# Altium PCB NM.BaseBoard.01.PcbDoc (part 1 of 2)
Units mm, origin at the board's own origin, x right, y up, seen from the top; angles counter-clockwise.
Board outline 100 x 120 mm, 2 copper layers (Top Layer, Bottom Layer), stack 0.747 mm thick; 54 components, 54 nets, 245 pads, 102 vias.
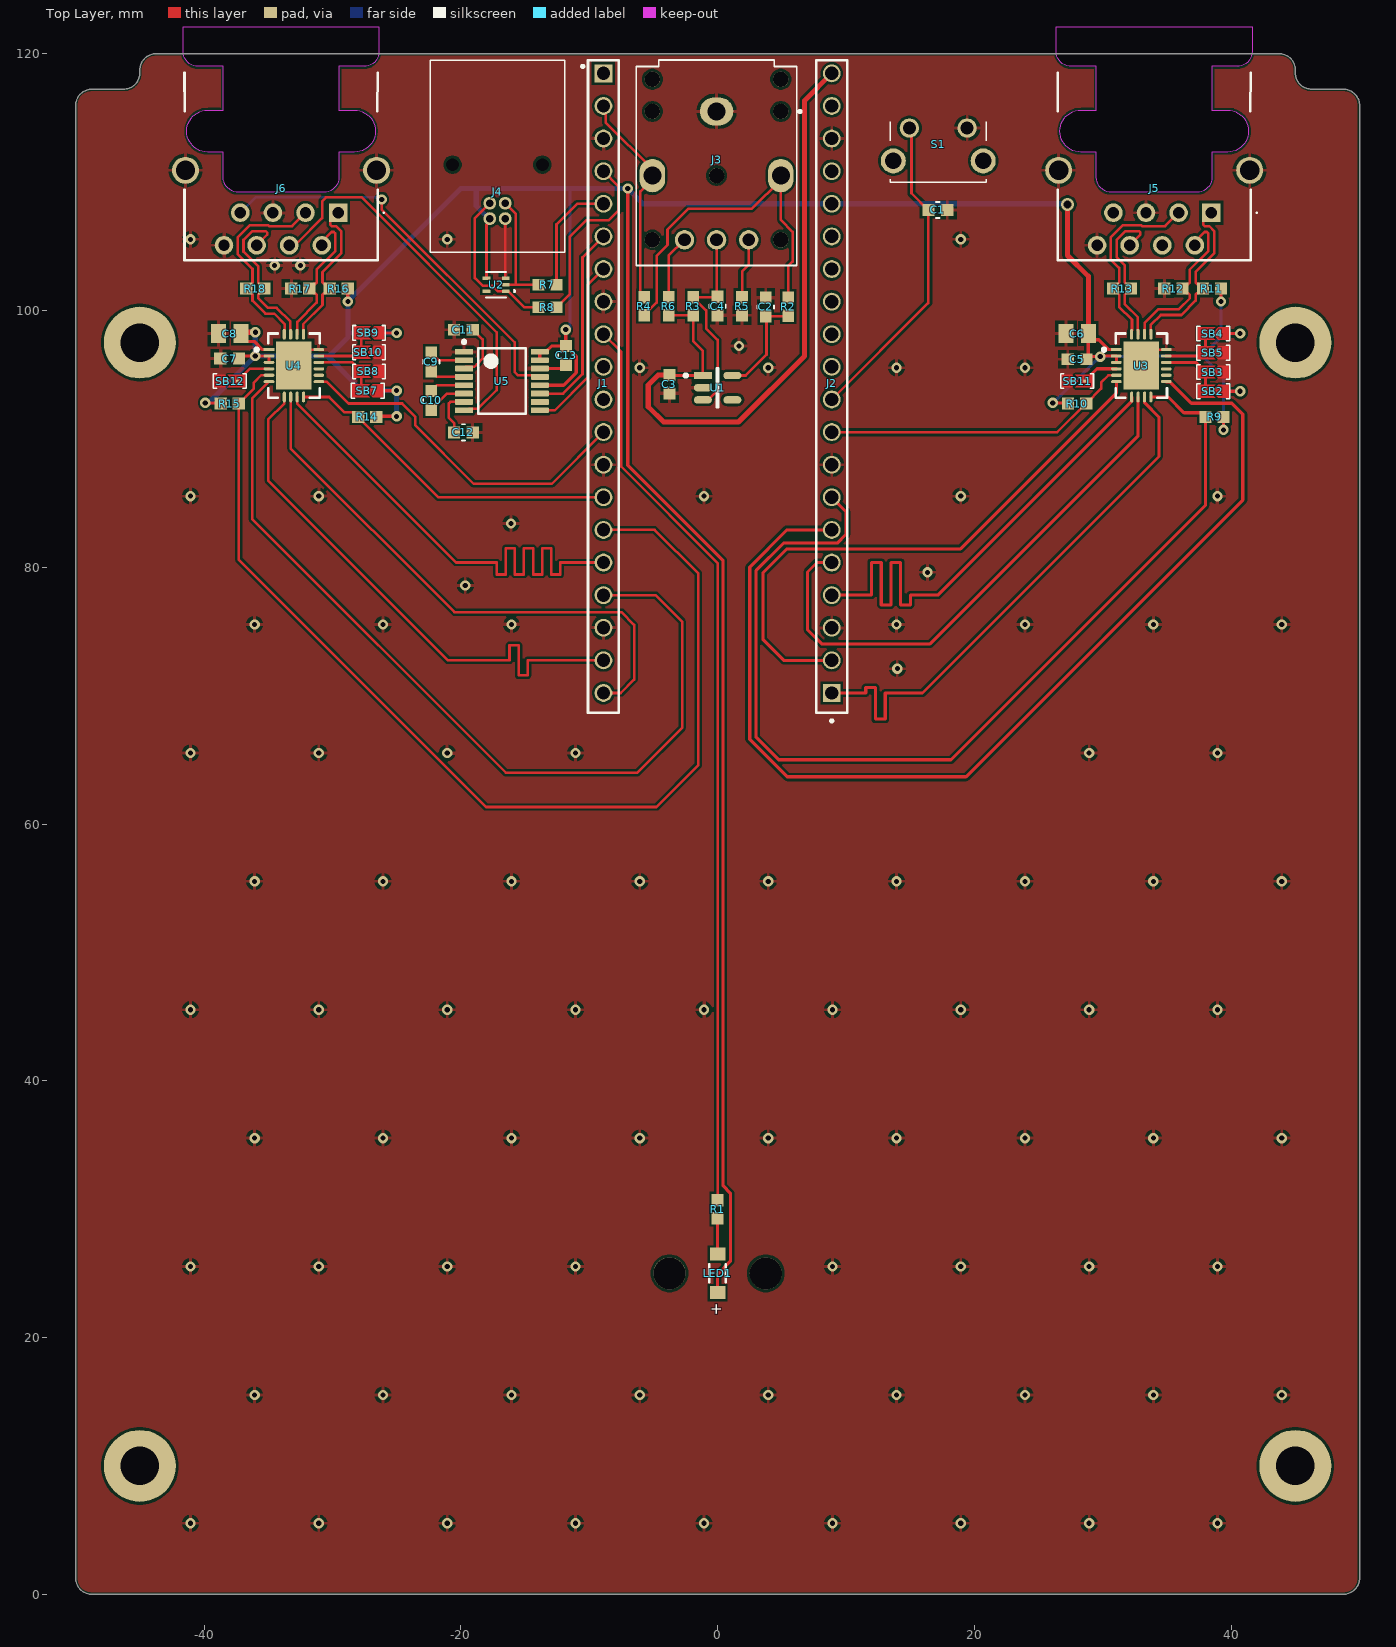
[diagram p0: Top Layer view]
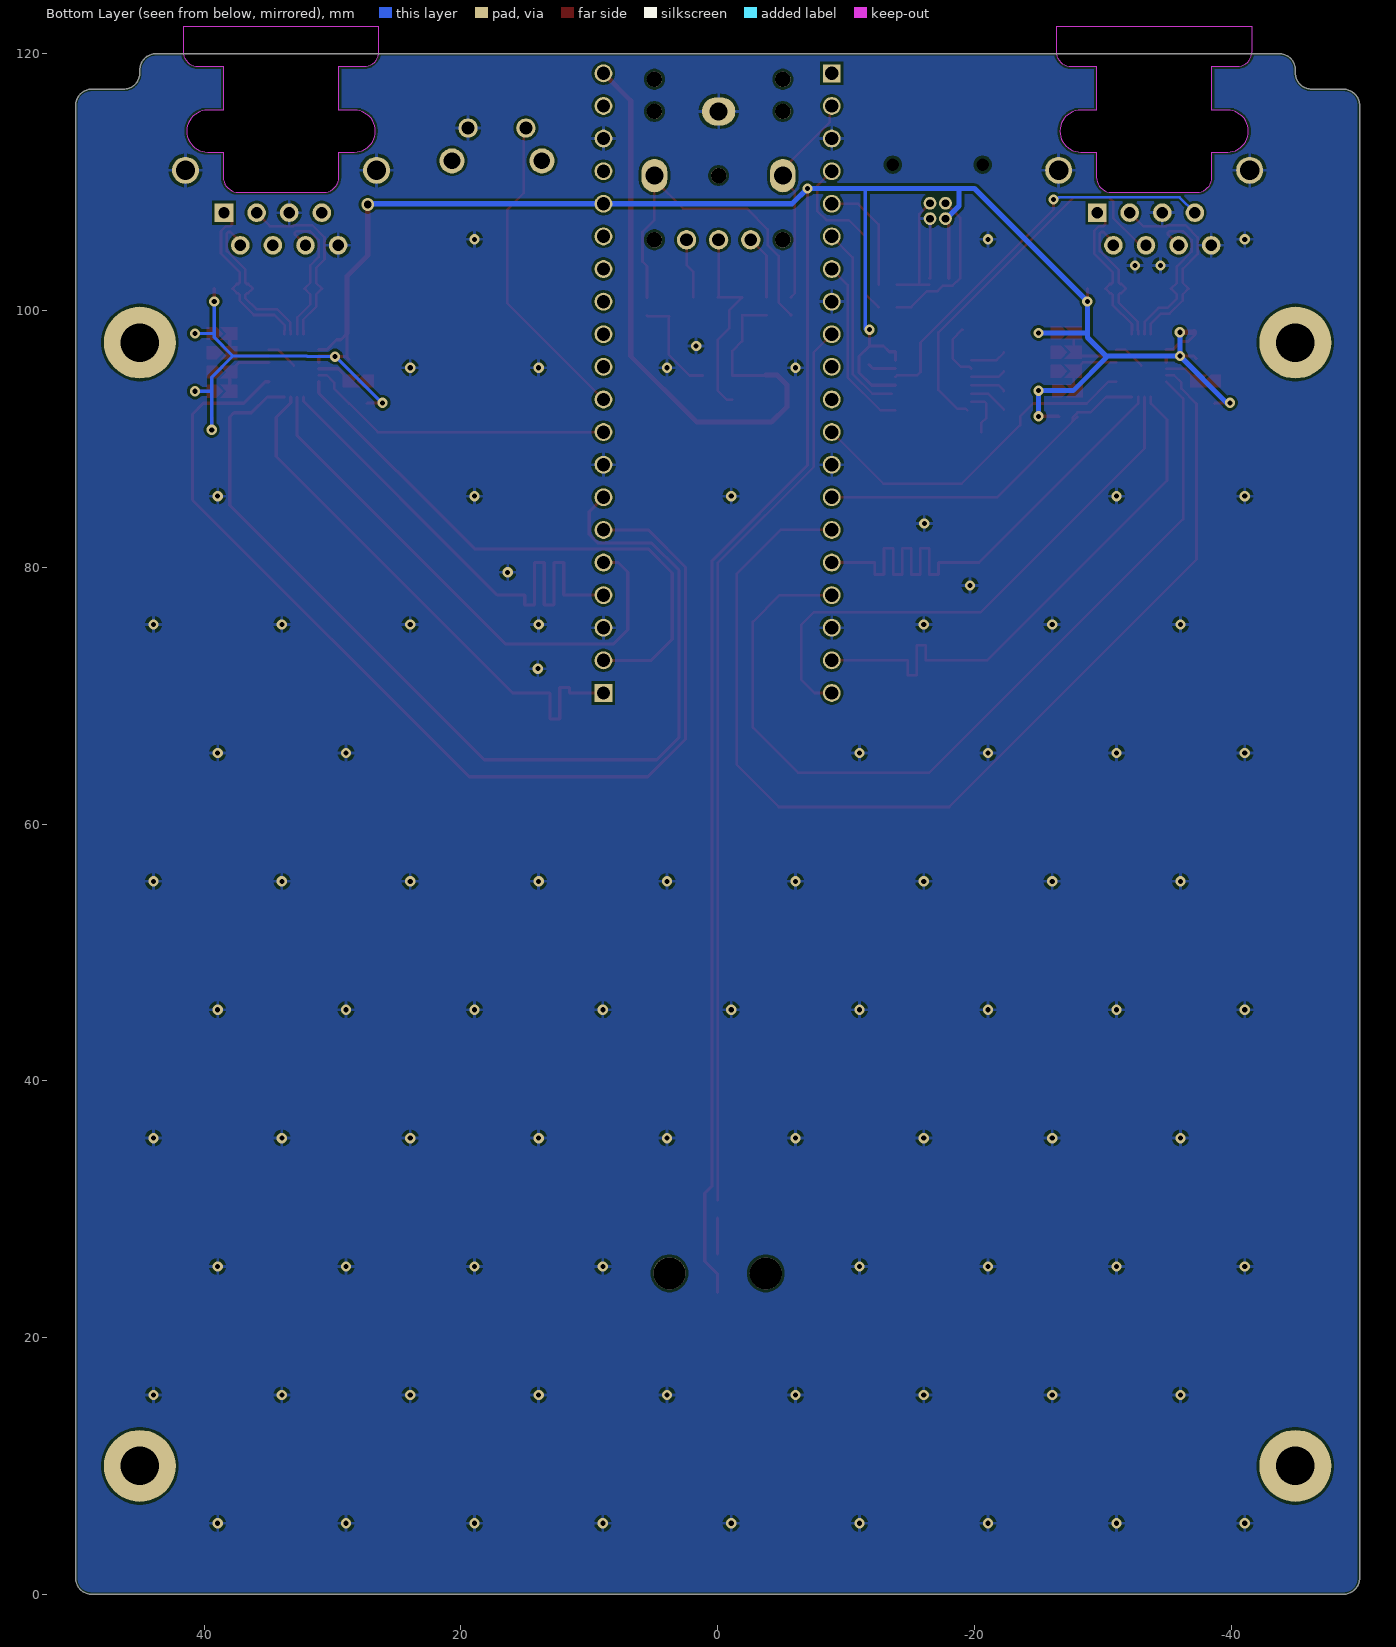
[diagram p1: Bottom Layer view, seen from below]
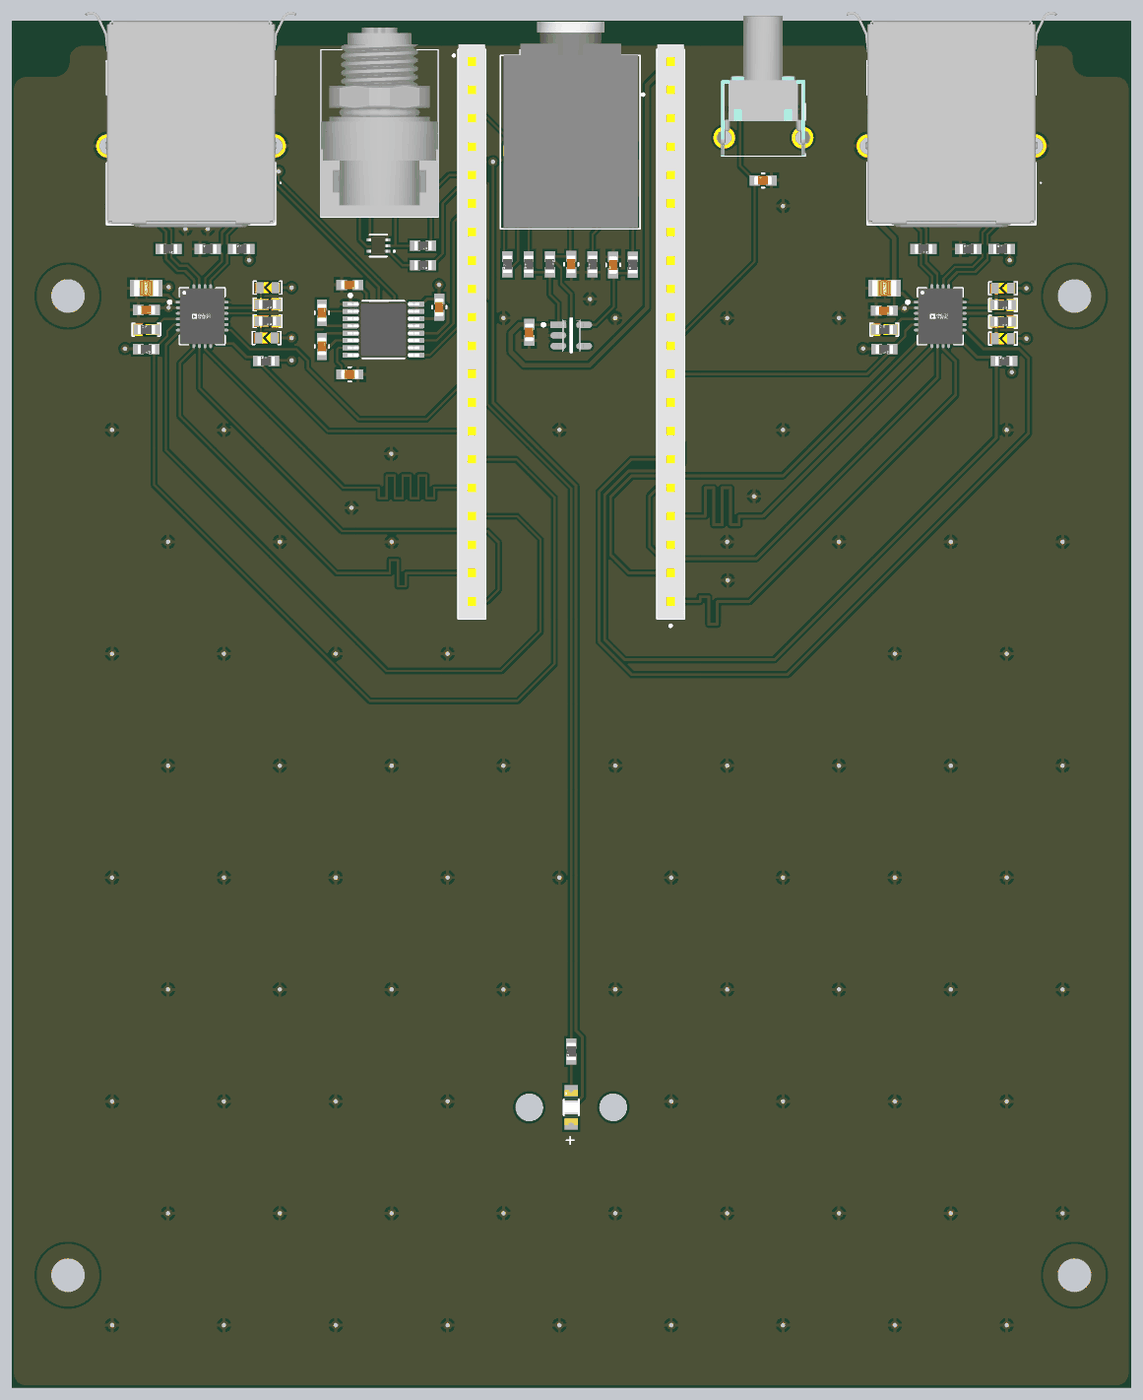
[diagram p2: 3D render of the assembled board from above, using the file's embedded part models]

## Layer stack, top to bottom
Top Solder: solder mask 0.0254, SM-001, Dk 4
Top Layer: signal copper 0.018
Dielectric 1: core 0.7112, Core-039, Dk 4.8
Bottom Layer: signal copper 0.018
Bottom Solder: solder mask 0.0254, SM-001, Dk 4

## Board outline
-50,1.27 ccw(c-48.73,1.27) -48.73,0 48.73,0 ccw(c48.73,1.27) 50,1.27 50,115.96 ccw(c48.73,115.96) 48.73,117.23 46.27,117.23 cw(c46.27,118.5) 45,118.5 45,118.73 ccw(c43.73,118.73) 43.73,120 -43.73,120 ccw(c-43.73,118.73) -45,118.73 -45,118.5 cw(c-46.27,118.5) -46.27,117.23 -48.73,117.23 ccw(c-48.73,115.96) -50,115.96

## Design rules (kind name [scope] priority, off if disabled: settings)
BoardOutlineClearance [All] p1: gap=0.15 ignorepadtopadclearanceinfootprint=FALSE except(0.05: Arc-OutlineEdge Arc-CavityEdge Arc-CutoutEdge Arc-SplitBarrior Arc-SplitContinuation)
Clearance Clearance_solderbridge [(HasFootprint('Solder Bridge 0603 On') OR HasFootprint('Solder Bridge 0603 Off'))] p1: gap=0.152 ignorepadtopadclearanceinfootprint=TRUE except(0.229: Arc-Hole Track-Hole SMDPad-Hole THPad-Hole Via-Hole Fill-Hole Poly-Hole Region-Hole)
Clearance [All] p2: gap=0.203 ignorepadtopadclearanceinfootprint=TRUE
ComponentClearance [All] p1: gap=0.254 collisioncheckmode=3 verticalgap=0.254 showdistances=FALSE donotcheckwithout3dbody=TRUE
DiffPairsRouting [All] p1: maxlimit=0.254 minlimit=0.254 mostfreqgap=0.254 toplayer_minwidth=0.2 toplayer_maxwidth=0.381 toplayer_prefwidth=0.381 bottomlayer_minwidth=0.2 bottomlayer_maxwidth=0.381 bottomlayer_prefwidth=0.381 maxuncoupledlength=12.7
HoleSize [All] p1: absolutevalues=TRUE maxlimit=4 minlimit=0.25 maxpercent=80.000 minpercent=20.000
HoleToHoleClearance [All] p1: gap=0.1 allowstackedmicrovias=TRUE
MinimumAnnularRing MinimumAnnularRing_VIA [IsVia] p1: minimumring=0.075
MinimumAnnularRing MinimumAnnularRing_VIA_U10 [OnLayer('Multi-Layer')] p2: minimumring=0.112
MinimumAnnularRing [All] p3: minimumring=0.178
MinimumSolderMaskSliver MinimumSolderMaskSliver_solderbridge [(HasFootprint('Solder Bridge 0603 On') OR HasFootprint('Solder Bridge 0603 Off'))] p1: minsoldermaskwidth=0.07
MinimumSolderMaskSliver [All] p2: minsoldermaskwidth=0.076
PolygonConnect PolygonConnect_1 [All] p1: connectstyle=Relief reliefconductorwidth=0.254 reliefentries=4 polygonreliefangle="90 Angle" airgapwidth=0.254
RoutingVias Vias_Top-Bottom [InDrillLayerPair('Top Layer - Bottom Layer')] p1: holewidth=0.4 width=0.8 viastyle="Through Hole" minholewidth=0.25 minwidth=0.5 maxholewidth=0.6 maxwidth=1
SilkToSilkClearance [All] p1: silktosilkclearance=0.1
SilkToSolderMaskClearance [IsPad] p1: minsilkscreentomaskgap=0.1 clearancetoexposedcopper=TRUE
SolderMaskExpansion SolderMaskExpansion_Vias [IsVia] p1: expansion=0 istentingtop=TRUE
SolderMaskExpansion [All] p2: expansion=0 istentingtop=FALSE
ViasUnderSMD [All] p1: allowed=TRUE
Width Width_50_Ohm [InNetClass('50 ohm')] p1 off: maxlimit=1.194 minlimit=0.2 preferedwidth=1.194
Width [All] p2: maxlimit=0.4 minlimit=0.2 preferedwidth=0.3
23 further rules are at their usual default settings.

## Classes and differential pairs
component class "SPI Extender 2": C7 C8 J6 R14 R15 R16 R17 R18 SB7 SB8 SB9 SB10 SB12 U4
component class "SPI Extender 1": C5 C6 J5 R9 R10 R11 R12 R13 SB2 SB3 SB4 SB5 SB11 U3
component class "RS232 Interface": C9 C10 C11 C12 C13 U5
component class PicoInterface: J1 J2
component class BaseFunctions: C1 C2 C3 C4 J3 J4 LED1 R1 R2 R3 R4 R5 R6 R7 R8 S1 U1 U2
differential pair TX2: +TX2_P -TX2_N
differential pair TX1: +TX1_P -TX1_N
differential pair RX2: +RX2_P -RX2_N
differential pair RX1: +RX1_P -RX1_N

## Components (designator, comment, footprint, x,y, rotation, side; value= is the part's Value field where it differs from the comment)
C1 "C0603-100nF-100V-10%-X7R" FP-GRM188-0_1-e0_2_0_5-IPC_B 17.15,107.825 r180 top value=100nF
C2 "C0603-1uF-25V-10%-X7R" FP-GRM188-0_1-e0_2_0_5-IPC_B 3.75,100.273 r270 top value=1µF
C3 "C0603-1uF-25V-10%-X7R" FP-GRM188-0_1-e0_2_0_5-IPC_B -3.75,94.25 r90 top value=1µF
C4 "C0603-100nF-100V-10%-X7R" FP-GRM188-0_1-e0_2_0_5-IPC_B 0,100.33 r90 top value=100nF
C5 "C0603-1uF-25V-10%-X7R" FP-GRM188-0_1-e0_2_0_5-IPC_B 28,96.2 r0 top value=1µF
C6 "C0805-4.7uF-16V-5%-X7R" CAPC2012X88N 28,98.2 r0 top value=4.7µF
C7 "C0603-1uF-25V-10%-X7R" FP-GRM188-0_1-e0_2_0_5-IPC_B -38,96.25 r0 top value=1µF
C8 "C0805-4.7uF-16V-5%-X7R" CAPC2012X88N -38,98.2 r0 top value=4.7µF
C9 "C0603-100nF-100V-10%-X7R" FP-GRM188-0_1-e0_2_0_5-IPC_B -22.3,96 r90 top value=100nF
C10 "C0603-100nF-100V-10%-X7R" FP-GRM188-0_1-e0_2_0_5-IPC_B -22.3,93 r90 top value=100nF
C11 "C0603-100nF-100V-10%-X7R" FP-GRM188-0_1-e0_2_0_5-IPC_B -19.8,98.5 r0 top value=100nF
C12 "C0603-100nF-100V-10%-X7R" FP-GRM188-0_1-e0_2_0_5-IPC_B -19.8,90.5 r180 top value=100nF
C13 "C0603-100nF-100V-10%-X7R" FP-GRM188-0_1-e0_2_0_5-IPC_B -11.8,96.5 r90 top value=100nF
J1 "SSW-120-01-x-S" SAMTEC_SSW-120-01-G-S -8.89,118.465 r270 top
J2 "SSW-120-01-x-S - 21-40" "SAMTEC_SSW-120-01-G-S - 21-40" 8.89,70.205 r90 top
J3 "SJ-3566AN" "CUI_SJ-3566AN - RM" -0.08,110.5 r270 top locked
J4 "853-004-213R001" 853-004-213R00Y -16.545,107.15 r180 top locked
J5 "RJULE4218201" "RJULE-42182-01 - RM" 34,121.2 r180 top
J6 "RJULE4218201" "RJULE-42182-01 - RM" -34,121.2 r180 top
LED1 "156125RS57000" "WL-SMRD_1205_normal use" 0,25 r270 top
R1 "R0603-1k5-1/16W-0.1%" FP-CPF0603-IPC_B 0,30 r90 top value=1.5k
R2 "R0603-10R-1/16W-0.1%" FP-CPF0603-IPC_B 5.5,100.298 r90 top value=10
R3 "R0603-10k-1/16W-0.1%" FP-CPF0603-IPC_B -1.905,100.33 r270 top value=10k
R4 "R0603-10k-1/16W-0.1%" FP-CPF0603-IPC_B -5.715,100.33 r90 top value=10k
R5 "R0603-1k-1/16W-0.1%" FP-CPF0603-IPC_B 1.905,100.33 r90 top value=1k
R6 "R0603-100k-1/16W-0.1%" FP-CPF0603-IPC_B -3.81,100.33 r90 top value=100k
R7 "R0603-150R-1/16W-0.1%" FP-CPF0603-IPC_B -13.25,102 r180 top value=150
R8 "R0603-150R-1/16W-0.1%" FP-CPF0603-IPC_B -13.25,100.25 r180 top value=150
R9 "R0603-10k-1/16W-0.1%" FP-CPF0603-IPC_B 38.702,91.7 r0 top value=10k
R10 "R0603-10k-1/16W-0.1%" FP-CPF0603-IPC_B 28,92.75 r180 top value=10k
R11 "R0603-620R-1/16W-0.1%" FP-CPF0603-IPC_B 38.5,101.7 r0 top value=620
R12 "R0603-620R-1/16W-0.1%" FP-CPF0603-IPC_B 35.5,101.7 r0 top value=620
R13 "R0603-110R-1/16W-0.1%" FP-CPF0603-IPC_B 31.5,101.7 r180 top value=110
R14 "R0603-10k-1/16W-0.1%" FP-CPF0603-IPC_B -27.298,91.7 r0 top value=10k
R15 "R0603-10k-1/16W-0.1%" FP-CPF0603-IPC_B -38,92.75 r180 top value=10k
R16 "R0603-620R-1/16W-0.1%" FP-CPF0603-IPC_B -29.5,101.7 r0 top value=620
R17 "R0603-620R-1/16W-0.1%" FP-CPF0603-IPC_B -32.5,101.7 r0 top value=620
R18 "R0603-110R-1/16W-0.1%" FP-CPF0603-IPC_B -36,101.7 r180 top value=110
S1 "PTS645VM83-2LFS" PTS645VM83-2LFS 19.435,114.2 r180 top locked
SB2 "Solder Bridge 0603 Off" "Solder Bridge 0603 Off" 38.6,93.7 r180 top
SB3 "Solder Bridge 0603 On" "Solder Bridge 0603 On" 38.6,95.2 r180 top
SB4 "Solder Bridge 0603 Off" "Solder Bridge 0603 Off" 38.6,98.2 r180 top
SB5 "Solder Bridge 0603 On" "Solder Bridge 0603 On" 38.6,96.7 r180 top
SB7 "Solder Bridge 0603 Off" "Solder Bridge 0603 Off" -27.25,93.75 r180 top
SB8 "Solder Bridge 0603 On" "Solder Bridge 0603 On" -27.15,95.25 r180 top
SB9 "Solder Bridge 0603 Off" "Solder Bridge 0603 Off" -27.15,98.25 r180 top
SB10 "Solder Bridge 0603 On" "Solder Bridge 0603 On" -27.15,96.75 r180 top
SB11 "Solder Bridge 0603 On" "Solder Bridge 0603 On" 28,94.5 r0 top
SB12 "Solder Bridge 0603 On" "Solder Bridge 0603 On" -38,94.5 r0 top
U1 "AP2112K-3.3TRG1" FP-SOT25-IPC_B 0,93.98 r0 top
U2 "TPD3E001DRLR" DRL5_TEX -17.25,102 r180 top
U3 "LTC4332HUFD#PBF" FP-UFD-20-05-08-1711-IPC_B 33,95.7 r0 top
U4 "LTC4332HUFD#PBF" FP-UFD-20-05-08-1711-IPC_B -33,95.7 r0 top
U5 "SN75C3221PWR" PW0016A_N -16.8,94.5 r0 top

## Footprints (in the part's own frame and the unit in brackets; to place one, negate y for a bottom-side part, rotate by r counter-clockwise, add the part's x,y. Pads: shape width x height; smd on the part's side, far side on the other; paste and mask are expansions set on the pad)
853-004-213R00Y [mm] "M5 FEMALE - RIGHT ANGLE - 4 POSITION"
  round 1 hole 0.6: 1(0,0) 2(1.2,0) 3(1.2,-1.2) 4(0,-1.2)
  round 0.6 hole 1 unplated: 5(-2.9,-4.2) 6(4.1,-4.2)
  silkscreen extent -4.65,-12.35 5.85,2.6, body extent -4.65,-14.35 5.85,2.55, height 10.55
CAPC2012X88N [mm] "SnapEDA"
  rect 1.16x1.47 smd: 1(-0.875,0) 2(0.875,0)
  body extent -1.1,-0.72 1.1,0.72, height 1
"CUI_SJ-3566AN - RM" [mm] "3.5 mm, Stereo, Right Angle, Through Hole, SPDT Switch, Audio Jack Connector"
  oval 2.2x2.6 hole 1.4: 1(-5,0)
  oval 2.6x2 hole 1.4: 2(0,-5) 3(0,5)
  round 1.508 hole 1: 4(5,2.5) 5(5,0) 6(5,-2.5)
  round 1.2 hole 1.2 unplated: MH1(5,5) MH2(5,-5) MH3(0,0) MH4(-5,5) MH5(-5,-5) MH6(-7.5,5) MH7(-7.5,-5)
  silkscreen extent -9,-6.24 7,6.6, body extent -11.54,-5.97 6.96,6.03, height 5.5
DRL5_TEX [mil] "5-SOT-5X3"
  rect 24x10 smd paste+0 mask+0: 1(-29.5,19.68) 2(-29.5,0) 3(-29.5,-19.69) 4(29.5,19.68) 5(29.5,-19.69)
  silkscreen extent -58,-39 31,39, body extent -34,-34 34,34, height 24
FP-CPF0603-IPC_B [mm]
  rect 0.958x0.912 smd paste+0 mask+0: 1(-0.702,0) 2(0.702,0)
  body extent -1.43,-0.71 1.43,0.71, height 0.25
FP-GRM188-0_1-e0_2_0_5-IPC_B [mm]
  rect 0.959x0.912 smd paste+0 mask+0: 1(-0.727,0) 2(0.727,0)
  silkscreen extent -0.13,-0.64 0.13,0.64, body extent -1.46,-0.71 1.46,0.71, height 0.25
FP-SOT25-IPC_B [mm]
  rect 1.407x0.576 smd paste+0 mask+0: 1(-1.151,0.95)
  rrect100% 1.407x0.576 smd paste+0 mask+0: 2(-1.151,0) 3(-1.151,-0.95) 4(1.151,-0.95) 5(1.151,0.95)
  silkscreen extent -2.6,-1.5 0.05,1.5, body extent -2.1,-1.75 2.1,1.75, height 0.25
FP-UFD-20-05-08-1711-IPC_B [mm]
  rect 0.831x0.242 smd paste+0 mask+0: 1(-1.941,1.25)
  rrect100% 0.831x0.242 smd paste+0 mask+0: 2(-1.941,0.75) 3(-1.941,0.25) 4(-1.941,-0.25) 5(-1.941,-0.75) 6(-1.941,-1.25) 11(1.941,-1.25) 12(1.941,-0.75) 13(1.941,-0.25) 14(1.941,0.25) 15(1.941,0.75) 16(1.941,1.25)
  rrect100% 0.242x0.831 smd paste+0 mask+0: 7(-0.75,-2.441) 8(-0.25,-2.441) 9(0.25,-2.441) 10(0.75,-2.441) 17(0.75,2.441) 18(0.25,2.441) 19(-0.25,2.441) 20(-0.75,2.441)
  rect 2.75x3.75 smd paste-1000 mask+0: 21(0,0)
  silkscreen extent -3.03,-2.5 2,2.5, body extent -2.61,-3.11 2.61,3.11, height 0.25
PTS645VM83-2LFS [mm] "PTS645 Series - 6 mm Tact Switches"
  round 1.5 hole 1: 1(0,0) 2(4.5,0)
  round 1.95 hole 1.3: MH1(-1.25,2.55) MH2(5.75,2.55)
  silkscreen extent -1.5,-0.5 6,4.2, body extent -1.96,-8.33 6.53,4.17, height 7.4
PW0016A_N [mm] "SOP, 16-Leads, Body 5.1x4.5mm, Pitch 0.65mm, IPC Medium Density"
  rrect22% 1.4x0.45 smd: 1(-2.95,2.275) 2(-2.95,1.625) 3(-2.95,0.975) 4(-2.95,0.325) 5(-2.95,-0.325) 6(-2.95,-0.975) 7(-2.95,-1.625) 8(-2.95,-2.275) 9(2.95,-2.275) 10(2.95,-1.625) 11(2.95,-0.975) 12(2.95,-0.325) 13(2.95,0.325) 14(2.95,0.975) 15(2.95,1.625) 16(2.95,2.275)
  silkscreen extent -3.07,-2.55 1.85,3.17, body extent -3.21,-2.5 3.21,2.5, height 1
"RJULE-42182-01 - RM" [mm] "Modular Connectors / Ethernet Connectors 8 contacts;Ultra Low profile;RA TH; RJ45 / With Round Mounting Holes"
  rect 1.446x1.446 hole 0.89: 1(-4.445,13.589)
  round 1.446 hole 0.89: 2(-3.175,16.129) 3(-1.905,13.589) 4(-0.635,16.129) 5(0.635,13.589) 6(1.905,16.129) 7(3.175,13.589) 8(4.445,16.129)
  round 2.1 hole 1.5: MH1(-7.44,10.289) MH2(7.44,10.289)
  round 1.63 hole 3.26 unplated: MH3(5.715,7.239) MH4(-5.715,7.239)
  Keep-Out Layer board cut-out: -7.625,-0.893 -7.625,1.02 -7.535,1.472 -7.279,1.854 -6.897,2.11 -6.445,2.2 -6.445,2.2 -4.5,2.2 -4.5,5.609 -5.715,5.609 -6.339,5.733 -6.868,6.086 -7.221,6.615 -7.345,7.239 -7.345,7.239 -7.221,7.863 -6.868,8.392 -6.339,8.745 -5.715,8.869 -5.715,8.869 -4.5,8.869 -4.5,10.82 -4.41,11.272 -4.154,11.654 -3.772,11.91 -3.32,12 -3.32,12 3.32,12 3.772,11.91 4.154,11.654 4.41,11.272 4.5,10.82 4.5,10.82 4.5,8.869 5.715,8.869 6.339,8.745 6.868,8.392 7.221,7.863 7.345,7.239 7.345,7.239 7.221,6.615 6.868,6.086 6.339,5.733 5.715,5.609 5.715,5.609 4.5,5.609 4.5,2.2 6.445,2.2 6.897,2.11 7.279,1.854 7.535,1.472 7.625,1.02 7.625,1.02 7.625,-0.893
  silkscreen extent -8.05,2.7 7.52,17.29, body extent -9.45,-1.69 9.46,17.56, height 9.58
SAMTEC_SSW-120-01-G-S [mm] "Socket Strip, 0.100\" Pitch"
  rect 1.39x1.39 hole 1.04: 1(0,0)
  round 1.39 hole 1.04: 2(2.54,0) 3(5.08,0) 4(7.62,0) 5(10.16,0) 6(12.7,0) 7(15.24,0) 8(17.78,0) 9(20.32,0) 10(22.86,0) 11(25.4,0) 12(27.94,0) 13(30.48,0) 14(33.02,0) 15(35.56,0) 16(38.1,0) 17(40.64,0) 18(43.18,0) 19(45.72,0) 20(48.26,0)
  silkscreen extent -1.03,-1.71 49.79,1.21, body extent -1.52,-1.21 49.78,1.21, height 8.51
"SAMTEC_SSW-120-01-G-S - 21-40" [mm] "Socket Strip, 0.100\" Pitch (pins 21 - 40)"
  rect 1.39x1.39 hole 1.04: 21(0,0)
  round 1.39 hole 1.04: 22(2.54,0) 23(5.08,0) 24(7.62,0) 25(10.16,0) 26(12.7,0) 27(15.24,0) 28(17.78,0) 29(20.32,0) 30(22.86,0) 31(25.4,0) 32(27.94,0) 33(30.48,0) 34(33.02,0) 35(35.56,0) 36(38.1,0) 37(40.64,0) 38(43.18,0) 39(45.72,0) 40(48.26,0)
  silkscreen extent -2.27,-1.21 49.29,1.21, body extent -1.52,-1.21 49.78,1.21, height 8.51
"Solder Bridge 0603 Off" [mil] "Solder Bridge 0603 OFF"
  round 10 smd paste-393.7 mask+1.97: 1(-19.69,0) 2(23.62,0)
  Top Layer region: -5.91,19.68 13.78,0 -5.91,-19.68 47.24,-19.68 47.24,19.68 -5.91,19.68
  Top Layer region: -47.24,-19.68 -47.24,19.68 -15.75,19.68 3.94,0 -15.75,-19.68 -47.24,-19.68
  silkscreen extent -50,-23 50,23
"Solder Bridge 0603 On" [mil] "Solder Bridge 0603 ON"
  round 10 smd paste-393.7 mask+1.97: 1(-19.69,0) 2(23.62,0)
  Top Layer region: -47.24,-19.68 -47.24,19.68 -15.75,19.68 3.94,0 -15.75,-19.68 -47.24,-19.68
  Top Layer region: -5.91,19.68 13.78,0 -5.91,-19.68 47.24,-19.68 47.24,19.68 -5.91,19.68
  silkscreen extent -50,-23 50,23, body extent -56,-28 56,28, height 10
"WL-SMRD_1205_normal use" [mm] "SMD Mono-color  Reverse mount Diffused, body 3.2x1.2mm"
  rect 1x1.2 smd: 1(-1.5,0) 2(1.5,0)
  silkscreen extent -0.7,-0.65 0.7,0.65, body extent -1.6,-0.6 1.6,0.6, height 1.1

## Part data
C1 C4 C9 C10 C11 C12 C13: library part CMP-611-0027-15, "0.1µF ±10% 100V Ceramic Capacitor X7R 0603 (1608 Metric)", Capacitance=100nF, Capacitor Type=Ceramic, Case Code (Imperial)=0603, Case Code (Metric)=1608, Dielectric=X7R, Max Operating Temperature=125°C, Min Operating Temperature=-55°C, Package Quantity=1, Tolerance=10%, Voltage=100V, Case/Package=0603, Construction=Flat, Depth=0.8mm, Height=0.8mm, Lead Free="Lead Free", Length=1.6mm, Material=Ceramic, Mount="Surface Mount", Packaging="Tape and Reel", Pick&PlaceFootprint=0603_CAP, Radiation Hardening=No, REACH SVHC="No SVHC", RoHS=Yes, RoHS Compliant=Yes, Series=GRM, Size=0.8mm, Termination=SMD/SMT, Thickness=0.035inch, Voltage Rating=100V, Voltage Rating (DC)=100V, Weight=0.000222oz, Width=0.8mm
C2 C3 C5 C7: library part CMP-611-0033-2, "1µF ±10% 25V Ceramic Capacitor X7R 0603 (1608 Metric)", Capacitance=1uF, Capacitor Type=Ceramic, Case Code (Imperial)=0603, Case Code (Metric)=1608, Dielectric=X7R, Max Operating Temperature=125°C, Min Operating Temperature=-55°C, Package Quantity=1, Tolerance=10%, Voltage=25V, Case/Package=0603, Construction=Flat, Depth=0.8mm, Height=0.9mm, Lead Free="Lead Free", Length=1.6mm, Material=Ceramic, Mount="Surface Mount", Packaging="Tape and Reel", Pick&PlaceFootprint=0603_CAP, Radiation Hardening=No, REACH SVHC=Yes, RoHS=Yes, RoHS Compliant=Yes, Series=GRM, Size=0.8mm, Termination=Wraparound, Thickness=0.035inch, Voltage Rating=25V, Voltage Rating (DC)=25V, Weight=0.000222oz, Width=0.8mm
C6 C8: library part CMP-611-0019-6, "4.7uF ±5% 16V Ceramic Capacitor X7R 0805 (2012 Metric)", Capacitance=4.7uF, Capacitor Type=Ceramic, Case Code (Imperial)=0805, Case Code (Metric)=2012, Dielectric=X7R, Max Operating Temperature=125°C, Min Operating Temperature=-55°C, Package Quantity=1, Tolerance=5%, Voltage=16V, Case/Package=0805, Depth=1.25mm, Dissipation Factor=0.025%, Height=1.25mm, Lead Free="Lead Free", Length=2mm, Material=Ceramic, Mount="Surface Mount", Number of Pins=2, Packaging="Cut Tape", Pick&PlaceFootprint=C0805, Radiation Hardening=No, REACH SVHC="No SVHC", RoHS=Yes, Termination=SMD/SMT, Thickness=0.053inch, Voltage Rating=16V, Voltage Rating (DC)=16V, Width=0.049inch
J1: library part CMP-310-0034-2, "Conn Socket Strip SKT 20 POS 2.54mm Solder ST Thru-Hole", Color=Black, Contact Material=Bronze, Contact Plating=Gold, Gender=Female, Mating Cycles=100, Mount="Through Hole", Number of Contacts=20, Number of Rows=1, Pitch=2.54mm, RoHS Compliant=Yes, Termination=Solder
J2: library part CMP-310-0035-1, "Conn Socket Strip SKT 20 POS 2.54mm Solder ST Thru-Hole (pins 21 - 40)", Color=Black, Contact Material=Bronze, Contact Plating=Gold, Gender=Female, Mating Cycles=100, Mount="Through Hole", Number of Contacts=20, Number of Rows=1, Pitch=2.54mm, RoHS Compliant=Yes, Termination=Solder
J3: library part CMP-300-0000-5, "3.5 mm, Stereo, Right Angle, Through Hole, SPDT Switch, Audio Jack Connector", Body/Shell Style=JACK, Connector Type="AUDIO/RCA CONNECTOR", Contact Finish - Mating="NOT SPECIFIED", DIN Conformance=No, IEC Conformance=No, MIL Conformance=No, Mount="Through Hole", Number of Poles=3, Number of Ports=1, Option="General Purpose", PartNumber=SJ-3566AN, Pick&PlaceFootprint=SJ-356xxx, REACH SVHC=Yes, RoHS Compliant=Yes, Termination=Solder
J4: library part CMP-370-0028-2, "CONN PLUG FMALE 4POS GOLD SOLDER", Current Rating=1A, Max Operating Temperature=85°C, Min Operating Temperature=-40°C, Ratings="IP67,Waterproof,Dust Tight", Voltage Rating=60V, Connector Type=Receptacle, Contact Plating=Gold, Fastening Type=Threaded, Mount="Through Hole,Panel", Number of Pins=4, Number of Positions=4, Packaging=Tray, REACH SVHC="No SVHC", RoHS Compliant=Yes, Termination=Solder
J5 J6: library part CMP-300-0001-5, "Modular Jack - Right Angle, Input Output Connectors RJ45, 8P8C, Without LEDs, Shield.", PartNumber=RJULE-42182-01, Mount="Surface Mount"
LED1: library part CMP-520-0011-1, "Single Color LED", Mount="Surface Mount", Optoelectronic Device Type="SINGLE COLOR LED", PartNumber=156125RS57000, REACH SVHC=Yes, RoHS Compliant=Yes
R1: library part CMP-633-0029-14, "Surface Mount Resistor 1k5 Ohm 1/16 W 0.1% 0603 (1608 Metric)", Case Code (Imperial)=0603, Case Code (Metric)=1608, Max Operating Temperature=155°C, Max Power Dissipation="62.5 mW", Min Operating Temperature=-55°C, Number of Resistors=1, Power Rating=62.5mW, Resistance=1.5k, Resistance Tolerance=0.1%, Resistor Type="Thin Film", Temperature Coefficient=25ppm/°C, Voltage Rating=50V, Case/Package=0603, Composition="Thin Film", ELV=Compliant, Height=0.45mm, Length=1.6mm, Mount="Surface Mount", Number of Pins=2, Number of Terminations=2, Packaging="Tape and Reel", Pick&PlaceFootprint=R0603, REACH SVHC="No SVHC", RoHS=Yes, RoHS Compliant=Yes, Series=CPF, Size Code=0603, Technology="Thin Film", Termination=Solder, Tolerance=0.1%, Voltage Rating (DC)=50V, Weight=7.1E-05oz, Width=0.8mm
R2: library part CMP-633-0069-10, "Surface Mount Resistor 10 Ohm 1/16 W 0.1% 0603 (1608 Metric)", Case Code (Imperial)=0603, Case Code (Metric)=1608, Max Operating Temperature=155°C, Max Power Dissipation="62.5 mW", Min Operating Temperature=-55°C, Number of Resistors=1, Power Rating=62.5mW, Resistance=10, Resistance Tolerance=0.1%, Resistor Type="Thin Film", Temperature Coefficient=25ppm/°C, Voltage Rating=50V, Case/Package=0603, Composition="Thin Film", ELV=Compliant, Height=0.45mm, Length=1.6mm, Mount="Surface Mount", Number of Pins=2, Number of Terminations=2, Packaging="Tape and Reel", Pick&PlaceFootprint=R0603, REACH SVHC="No SVHC", RoHS=Yes, RoHS Compliant=Yes, Series=CPF, Size Code=0603, Technology="Thin Film", Termination=Solder, Tolerance=0.1%, Voltage Rating (DC)=50V, Weight=7.1E-05oz, Width=0.8mm
R3 R4 R9 R10 R14 R15: library part CMP-633-0002-15, "Surface Mount Resistor 10k Ohm 1/16 W 0.1% 0603 (1608 Metric)", Case Code (Imperial)=0603, Case Code (Metric)=1608, Max Operating Temperature=155°C, Max Power Dissipation="62.5 mW", Min Operating Temperature=-55°C, Number of Resistors=1, Power Rating=62.5mW, Resistance=10k, Resistance Tolerance=0.1%, Resistor Type="Thin Film", Temperature Coefficient=25ppm/°C, Voltage Rating=50V, Case/Package=0603, Composition="Thin Film", ELV=Compliant, Height=0.45mm, Length=1.6mm, Mount="Surface Mount", Number of Pins=2, Number of Terminations=2, Packaging="Tape and Reel", Pick&PlaceFootprint=R0603, REACH SVHC="No SVHC", RoHS=Yes, RoHS Compliant=Yes, Series=CPF, Size Code=0603, Technology="Thin Film", Termination=Solder, Tolerance=0.1%, Voltage Rating (DC)=50V, Weight=7.1E-05oz, Width=0.8mm
R5: library part CMP-633-0013-15, "Surface Mount Resistor 1k Ohm 1/16 W 0.1% 0603 (1608 Metric)", Case Code (Imperial)=0603, Case Code (Metric)=1608, Max Operating Temperature=155°C, Max Power Dissipation="62.5 mW", Min Operating Temperature=-55°C, Number of Resistors=1, Power Rating=62.5mW, Resistance=1k, Resistance Tolerance=0.1%, Resistor Type="Thin Film", Temperature Coefficient=25ppm/°C, Voltage Rating=50V, Case/Package=0603, Composition="Thin Film", ELV=Compliant, Height=0.45mm, Length=1.6mm, Mount="Surface Mount", Number of Pins=2, Number of Terminations=2, Packaging="Tape and Reel", Pick&PlaceFootprint=R0603, REACH SVHC="No SVHC", RoHS=Yes, RoHS Compliant=Yes, Series=CPF, Size Code=0603, Technology="Thin Film", Termination=Solder, Tolerance=0.1%, Voltage Rating (DC)=50V, Weight=7.1E-05oz, Width=0.8mm
R6: library part CMP-633-0000-17, "Surface Mount Resistor 100k Ohm 1/16 W 0.1% 0603 (1608 Metric)", Case Code (Imperial)=0603, Case Code (Metric)=1608, Max Operating Temperature=155°C, Max Power Dissipation="62.5 mW", Min Operating Temperature=-55°C, Number of Resistors=1, Power Rating=62.5mW, Resistance=100k, Resistance Tolerance=0.1%, Resistor Type="Thin Film", Temperature Coefficient=25ppm/°C, Voltage Rating=50V, Case/Package=0603, Composition="Thin Film", ELV=Compliant, Height=0.45mm, Length=1.6mm, Mount="Surface Mount", Number of Pins=2, Number of Terminations=2, Packaging="Tape and Reel", Pick&PlaceFootprint=R0603, REACH SVHC="No SVHC", RoHS=Yes, RoHS Compliant=Yes, Series=CPF, Size Code=0603, Technology="Thin Film", Termination=Solder, Tolerance=0.1%, Voltage Rating (DC)=50V, Weight=7.1E-05oz, Width=0.8mm
R7 R8: library part CMP-633-0078-2, "Surface Mount Resistor 150 Ohm 1/16 W 0.1% 0603 (1608 Metric)", Case Code (Imperial)=0603, Case Code (Metric)=1608, Max Operating Temperature=155°C, Max Power Dissipation="62.5 mW", Min Operating Temperature=-55°C, Number of Resistors=1, Power Rating=62.5mW, Resistance=150, Resistance Tolerance=0.1%, Resistor Type="FIXED RESISTOR", Temperature Coefficient=25ppm/°C, Voltage Rating=50V, Case/Package=0603, Composition="Thin Film", Construction=Chip, ELV=Compliant, Height=0.45mm, Length=1.6mm, Mount="Surface Mount", Number of Pins=2, Number of Terminations=2, Packaging="Tape and Reel", Pick&PlaceFootprint=R0603, REACH SVHC=Yes, RoHS=Yes, RoHS Compliant=Yes, Series=CPF, Size Code=0603, Technology="THIN FILM", Termination=Wraparound, Tolerance=0.1%, Voltage Rating (DC)=50V, Weight=7.1E-05oz, Width=0.8mm
R11 R12 R16 R17: library part CMP-633-0079-2, "Surface Mount Resistor 620 Ohm 1/16 W 0.1% 0603 (1608 Metric)", Case Code (Imperial)=0603, Case Code (Metric)=1608, Max Operating Temperature=155°C, Max Power Dissipation="62.5 mW", Min Operating Temperature=-55°C, Number of Resistors=1, Power Rating=62.5mW, Resistance=620, Resistance Tolerance=0.1%, Resistor Type="FIXED RESISTOR", Temperature Coefficient=25ppm/°C, Voltage Rating=50V, Case/Package=0603, Composition="Thin Film", Construction=Chip, ELV=Compliant, Height=0.45mm, Length=1.6mm, Mount="Surface Mount", Number of Pins=2, Number of Terminations=2, Packaging="Tape and Reel", Pick&PlaceFootprint=R0603, REACH SVHC=Yes, RoHS=Yes, RoHS Compliant=Yes, Series=CPF, Size Code=0603, Technology="THIN FILM", Termination=Wraparound, Tolerance=0.1%, Voltage Rating (DC)=50V, Weight=7.1E-05oz, Width=0.8mm
R13 R18: library part CMP-633-0080-2, "Surface Mount Resistor 110 Ohm 1/16 W 0.1% 0603 (1608 Metric)", Case Code (Imperial)=0603, Case Code (Metric)=1608, Max Operating Temperature=155°C, Max Power Dissipation="62.5 mW", Min Operating Temperature=-55°C, Number of Resistors=1, Power Rating=62.5mW, Resistance=110, Resistance Tolerance=0.1%, Resistor Type="FIXED RESISTOR", Temperature Coefficient=25ppm/°C, Voltage Rating=50V, Case/Package=0603, Composition="Thin Film", Construction=Chip, ELV=Compliant, Height=0.45mm, Length=1.6mm, Mount="Surface Mount", Number of Pins=2, Number of Terminations=2, Packaging="Tape and Reel", Pick&PlaceFootprint=R0603, REACH SVHC=Yes, RoHS=Yes, RoHS Compliant=Yes, Series=CPF, Size Code=0603, Technology="THIN FILM", Termination=Wraparound, Tolerance=0.1%, Voltage Rating (DC)=50V, Weight=7.1E-05oz, Width=0.8mm
S1: library part CMP-B00-0002-2, "Switch Tactile N.O. SPST Round Button PC Pins 0.05A 12VDC 100000Cycles 1.57N Bracket Mount/Through Hole Bulk", Color=Black, Current Rating=50mA, Max Operating Temperature=60°C, Min Operating Temperature=-20°C, Operating Force=1.57N, Package Quantity=1000, Voltage Rating (DC)=12V, Actuator Material=Nylon,Polyamide,PA66, Actuator Type=Standard, Contact Plating=Silver, Depth=12.3mm, Illumination Type=Non-Illuminated, Length=7.5mm, Max Current Rating=50mA, Mechanical Life=100000Cycles, Mount="Through Hole", Orientation="Right Angle", Packaging=Bulk, RoHS Compliant=Yes, Series=PTS645, Switch Function=Off-Mom, Termination="PC Pins", Throw Configuration=SPST
SB2 SB4 SB7 SB9: library part CMP-B00-0001-2, "Solder Bridge 0603 OFF"
SB3 SB5 SB8 SB10 SB11 SB12: library part CMP-B00-0000-4, "Solder Bridge 0603 ON", Case/Package=R0603, PartNumber=R0603-0R-1/16W-0.1%, Mount=SMD, Pick&PlaceFootprint=R0603, Pins=2
U1: library part CMP-970-0025-2, "Fixed Positive LDO Regulator, 3.3V, 0.4V Dropout, CMOS, PDSO5", Dropout Voltage1-Max=400mV, Dropout Voltage1-Nom=250mV, Input Voltage Absolute-Max=6.5V, Max Input Voltage=6V, Max Operating Temperature=85°C, Min Input Voltage=2.5V, Min Operating Temperature=-40°C, Output Current1-Max=600mA, Output Voltage1-Max=3.3495V, Output Voltage1-Min=3.2505V, Output Voltage1-Nom=3.3V, Package Body Material=Plastic, Package Code=LSSOP, Package Equivalence Code=TSOP5/6,.11,37, Package Shape=Rectangular, Package Style="SMALL OUTLINE, LOW PROFILE, SHRINK PITCHMeter", Voltage Tolerance-Max=1.5%, Adjustability=FIXED, Height - Seated (Max)=1.45mm, JESD-30 Code=R-PDSO-G5, JESD-609 Code=e3, Length=2.92mm, Line Regulation-Max=0.00561%, Load Regulation-Max=0.0198%, Moisture Sensitivity Level=3, Number of Functions=1, Number of Outputs=1, Number of Pins=5, Operating Temperature, TJ-Max=85°C, Operating Temperature, TJ-Min=-40°C, Packaging="Tape and Reel", PartNumber=AP2112K-3.3TRG1, Pick&PlaceFootprint=SOT25, Qualification Status="Not Qualified", REACH SVHC=Yes, Regulator Type="FIXED POSITIVE SINGLE OUTPUT LDO REGULATOR", RoHS Compliant=Yes, Surface Mount=Yes, Technology=CMOS, Terminal Finish=Tin, Terminal Form="Gull Wing", Terminal Pitch=0.95mm, Terminal Position=DUAL, Width=1.6mm
U2: library part CMP-820-0000-4, "Low-Capacitance 3-Channel +/-15KV ESD-Protection Array for High-Speed Data Interfaces 5-SOT-5X3", Mount="Surface Mount", PartNumber=TPD3E001DRLR, Pick&PlaceFootprint=DRL-5
U3 U4: library part CMP-930-0001-1, "SPI Extender Over Rugged Differential Link", PartNumber=LTC4332HUFD#PBF, Pick&PlaceFootprint=QFN-20-4-5, RoHS Compliant=Yes
U5: library part CMP-930-0000-8, "IC RS232 DRVR/RCVR 1-CH 16-TSSOP", Case/Package=TSSOP, Max Operating Temperature=70°C, Max Supply Voltage=5.5V, Min Operating Temperature=0°C, Min Supply Voltage=3V, Nominal Supply Current=1mA, Operating Supply Voltage=5V, Package Quantity=1, Data Rate=1000Kbps, Lead Free="Lead Free", Logic Function=Transceiver,Receiver, Mount="Surface Mount", Number of Drivers=1, Number of Pins=16, Number of Receivers=1, Number of Transceivers=1, Number of Transmitters=1, Operating Supply Current=1mA, Packaging="Tape and Reel", PartNumber=SN75C3221PWR, Pick&PlaceFootprint=TSSOP-14, Radiation Hardening=No, REACH SVHC="No SVHC", Simplex/Duplex="Full Duplex", Weight=0.002183oz

## Free pads (board coordinates)
  round 5.6 hole 3 mask-1.524: 1(-45,10) 1(-45,97.5) 1(45,10) 1(45,97.5)
  round 2.5 hole 2.5 unplated mask+0: MH2(-3.75,25) MH3(3.75,25)

## Via types
v1: diameter 0.8, hole 0.4, Top Layer to Bottom Layer, tented both sides, 101 vias
v2: diameter 1, hole 0.6, Top Layer to Bottom Layer, tented both sides, 1 vias

## Nets (pads, with @x,y where several pads share a name; then routed paths per layer and width w, separated by ;. In a path a pad name is that pad's centre, name@x,y a point inside that pad or via, vN(x,y) a via of type N, cw(c..) or ccw(c..) an arc to the next point about the centre after c; other vN are vias at no path point)
3V3: C5.2 C6.2 C7.2 C8.2 C13.2 J2.36 J4.2 LED1.2 R9.2 R10.2 R11.2 R14.2 R15.2 R16.2 SB2.1 SB4.1 SB7.1 SB9.1 U2.5 U3.1 U3.2 U3.3 U4.1 U4.2 U4.3 U5.12 U5.15 U5.16 | length 274.6
  Top Layer w0.25: v1(-39.9,92.8) -38.752,92.8 R15.2 ; C7.2 -37.073,96.45 v1(-36.007,96.45) U4.2 U4.3 ; C8.2 -37.125,98.045 -36.67,97.59 -36.09,97.59 -35.45,96.95 U4.1 ; v1(-28.8,100.7) -28.8,101.698 R16.2 ; SB7.1 v1(-25,93.75) ; SB9.1 v1(-25,98.25) ; R14.2 -26.546,91.75 v1(-25,91.75) ; U2.5 -17.999,106.693 -17.745,106.947 J4.2 ; U5.12 -11.999,94.175 -11.016,95.158 -11.016,96.419 -11.8,97.203 C13.2 ; U5.15 U5.16 -13.375,96.775 -12.923,97.227 -11.823,97.227 -11.827,97.23 v1(-11.827,98.5) ; v1(-7,109.5) -7,87.931 0.428,80.502 0.428,31.822 1,31.25 1,25.936 0,24.936 LED1.2 ; v1(26.1,92.8) 27.248,92.8 R10.2 ; C5.2 C5.2@28.875,96.348 ; C6.2 C6.2@28.875,98.171 ; U3.3 U3.2 29.85,96.45 v1(29.8,96.4) 28.927,96.4 C5.2@28.875,96.348 ; U3.1 30.45,96.95 29.684,97.716 29.33,97.716 C6.2@28.875,98.171 ; SB2.1 v1(40.7,93.7) ; SB4.1 v1(40.7,98.2) ; v1(39.202,100.702) R11.2 ; v1(39.4,90.7) 39.4,91.696 R9.2 ; C5.2@28.875,96.348 C6.2@28.875,98.171
  Top Layer w0.4: C8.2@-37.125,98.355 C8.2 -37.025,98.3 v1(-36,98.3) ; v2(27.25,108.25) 27.25,104.285 28.875,102.66 C6.2
  Bottom Layer w0.25: v1@-11.527,98.5 -11.5,98.527 -11.5,109.5 ; v1(26.1,92.8) 26.15,92.8 29.75,96.4 31.943,96.4 31.995,96.452 37.752,96.452 ; v1(39.202,100.702) 39.202,98.2 ; v1(39.4,90.7) 39.4,93.7 ; v1(40.7,93.7) 39.4,93.7 ; v1(40.7,98.2) 39.202,98.2 ; 37.752,96.452 39.4,94.804 39.4,93.7 ; 37.752,96.452 39.202,97.902 39.202,98.2
  Bottom Layer w0.4: v1(-39.9,92.8) -39.657,92.8 v1(-36.007,96.45) ; v1(-36,98.3) -36.007,98.293 v1(-36.007,96.45) ; v1(-25,91.75) v1(-25,93.75) -27.694,93.75 -30.394,96.45 ; v1(-25,98.25) -28.8,98.25 ; J4.2 -17.822,107.15 -18.8,108.128 -18.8,109.5 ; v2(27.25,108.25) 27.195,108.305 -5.805,108.305 v1(-7,109.5) -11.5,109.5 -18.449,109.5 -18.597,109.5 -18.8,109.5 ; v1(-36.007,96.45) -30.394,96.45 ; -30.394,96.45 -30.25,96.45 -28.8,97.9 -28.8,98.25 ; -28.8,98.25 v1(-28.8,100.7) -20,109.5 -18.8,109.5
ENABLE: C4.2 J3.5 R3.1 U1.3 | length 15.9
  Top Layer w0.2: U1.3 -0.735,93.03 0,93.765 0,97.7 -0.9,98.6 -0.9,100.004 -1.905,101.009 R3.1 -0.025,101.032 -0.08,101.087 J3.5
GND: C1.1 C2.1 C3.1 C4.1 C5.1 C6.1 C7.1 C8.1 C11.1 C12.1 C13.1 J1.3 J1.8 J1.13 J1.18 J2.23 J2.28 J2.38 J3.1 J4.1 J5.5 J5.8 J5.MH1 J5.MH2 J6.5 J6.8 J6.MH1 J6.MH2 R5.1 R12.1 R17.1 S1.1 SB3.1 SB5.1 SB8.1 SB10.1 SB11.1 SB12.1 U1.2 U2.3 U3.16 U3.21 U4.16 U4.21 U5.1 U5.14 | length 11.8
  Top Layer w0.2: U4.21 -31.75,96.95 U4.16 ; J4.1 -16.545,102.527 -16.518,102.5 U2.3 ; U3.21 34.25,96.95 U3.16
  Top Layer w0.25: U5.14 -12.098,95.475 C13.1
  other v1: -41.06,5.535 -31.06,5.535 -21.06,5.535 -11.06,5.535 -1.06,5.535 8.94,5.535 18.94,5.535 28.94,5.535 38.94,5.535 -36.06,15.535 -26.06,15.535 -16.06,15.535 -6.06,15.535 3.94,15.535 13.94,15.535 23.94,15.535 33.94,15.535 43.94,15.535 -41.06,25.535 -31.06,25.535 -21.06,25.535 -11.06,25.535 8.94,25.535 18.94,25.535 28.94,25.535 38.94,25.535 -36.06,35.535 -26.06,35.535 -16.06,35.535 -6.06,35.535 3.94,35.535 13.94,35.535 23.94,35.535 33.94,35.535 43.94,35.535 -41.06,45.535 -31.06,45.535 -21.06,45.535 -11.06,45.535 -1.06,45.535 8.94,45.535 18.94,45.535 28.94,45.535 38.94,45.535 -36.06,55.535 -26.06,55.535 -16.06,55.535 -6.06,55.535 3.94,55.535 13.94,55.535 23.94,55.535 33.94,55.535 43.94,55.535 -41.06,65.535 -31.06,65.535 -21.06,65.535 -11.06,65.535 28.94,65.535 38.94,65.535 14,72.1 -36.06,75.535 -26.06,75.535 -16.06,75.535 13.94,75.535 23.94,75.535 33.94,75.535 43.94,75.535 -19.65,78.575 16.35,79.6 -16.1,83.4 -41.06,85.535 -31.06,85.535 -1.06,85.535 18.94,85.535 38.94,85.535 -6.06,95.535 3.94,95.535 13.94,95.535 23.94,95.535 1.673,97.227 -34.5,103.5 -32.5,103.5 -41.06,105.535 -21.06,105.535 18.94,105.535
GP1: J1.2 J3.2 R4.2 | length 17
  Top Layer w0.2: J1.2 -8.723,115.758 -8.723,114.648 -5.08,111.005 -5.08,110.2 -6.009,109.271 -6.009,101.326 R4.2
GP2: J1.4 R8.1 | length 14.1
  Top Layer w0.2: R8.1 -12.525,100.25 -11.5,101.275 -11.5,105.75 -10.215,107.035 -8.465,107.035 -7.75,107.75 -7.75,109.705 J1.4
GP3: J1.5 R7.1 | length 9
  Top Layer w0.2: R7.1 -12.548,106.702 -10.945,108.305 J1.5
GP6: J1.9 R1.2 | length 71.1
  Top Layer w0.2: J1.9 -7.5,96.755 -7.5,87.825 0,80.325 R1.2
GP9: J1.12 U4.11 | length 27.5
  Top Layer w0.2: U4.11 -30.45,94.45 -28.75,92.75 -24.575,92.75 -23.56,91.735 -23.56,91.06 -19,86.5 -12.915,86.5 J1.12
GP10: J1.14 R14.1 U4.10 | length 27.2
  Top Layer w0.2: U4.10 -30.257,93.259 -29.054,92.056 R14.1@-28,92.056 ; R14.1 -27.673,91.373 -27.65,91.373 -27.621,91.344 -27.621,91.321 -21.745,85.445 J1.14 ; R14.1@-28,92.006 -27.648,91.654 R14.1@-27.648,91.398
GP11: J1.15 R15.1 U4.5 | length 84.5
  Top Layer w0.2: U4.5 -35.55,94.95 -36.123,94.377 -36.123,93.902 -37.275,92.75 R15.1 -37.298,80.598 -18.025,61.325 -4.775,61.325 -1.5,64.6 -1.5,79.5 -4.905,82.905 J1.15
GP20: J2.26 U3.11 | length 83.2
  Top Layer w0.25: J2.26 5.405,82.905 2.5,80 2.5,66.6 5.425,63.675 19.35,63.675 40.9,85.225 40.9,91.925 40.05,92.775 36.902,92.775 35.227,94.45 U3.11
GP21: J2.27 R9.1 U3.10 | length 80.2
  Top Layer w0.25: J2.27 10,84.335 10,82.568 9.314,81.882 5.132,81.882 3,79.75 3,66.75 4.75,65 18.175,65 38,84.825 R9.1 37.669,92.031 36.314,92.031 35.086,93.259 U3.10
GP22: J2.29 R10.1 U3.5 | length 24.3
  Top Layer w0.2: J2.29 26.454,90.525 28.679,92.75 R10.1 ; R10.1@28.713,92.75 29.866,93.902 29.866,94.377 30.438,94.95 U3.5@31.048,94.95
IO1: J4.3 R8.2 U2.1 | length 12.2
  Top Layer w0.2: J4.3 -18.9,107.195 -18.9,102.525 -18.305,101.93 -17.569,101.93 -17.139,101.5 U2.1 -16.323,101.5 -15.073,100.25 R8.2
IO2: J4.4 R7.2 U2.2 | length 9.3
  Top Layer w0.2: J4.4 -15.719,107.524 -15.719,101.984 ; U2.2 U2.2@-16.323,102 ; U2.2@-16.323,101.984 -16.253,101.984 -15.719,101.984 ; R7.2 -13.968,101.984 -15.719,101.984
LM_RX: J6.7 U5.13 | length 31.4
  Top Layer w0.2: v1(-26.163,108.637) -26.163,107.863 -15.8,97.5 -15.8,95.2 -15.547,94.947 -13.972,94.947 U5.13
  Bottom Layer w0.2: J6.7 -35.986,108.8 -26.58,108.8 -26.532,108.752 -26.278,108.752 v1(-26.163,108.637)
LM_TX: J6.4 U5.8 | length 30.2
  Top Layer w0.2: J6.4 -33.127,105.309 -32.691,105.309 -30.8,107.2 -30.8,108.5 -30.5,108.8 -27.709,108.8 -17.2,98.291 -17.2,93.8 -18.653,92.347 -19.328,92.347 U5.8@-19.45,92.225
NetC2_2: C2.2 R2.1 U1.5 | length 8.1
  Top Layer w0.2: U1.5 2.18,94.93 3.81,96.56 3.81,99.487 C2.2 5.451,99.547 R2.1
NetC9_1: C9.1 U5.4 | length 2.7
  Top Layer w0.2: C9.1 -22.3,95.25 -21.875,94.825 U5.4
NetC9_2: C9.2 U5.2 | length 2.8
  Top Layer w0.2: C9.2 -22.3,96.703 -21.722,96.125 U5.2
NetC10_1: C10.1 U5.6 | length 3.1
  Top Layer w0.2: C10.1 -22.3,92.297 -21.072,93.525 U5.6
NetC10_2: C10.2 U5.5 | length 2.7
  Top Layer w0.2: C10.2 -22.3,93.75 -21.875,94.175 U5.5
NetC11_2: C11.2 U5.3 | length 4.4
  Top Layer w0.2: U5.3 -19.628,95.597 -18.953,95.597 -18.747,95.803 -18.3,96.25 -18.3,97.75 -19.05,98.5 C11.2
NetC12_2: C12.2 U5.7 | length 3.6
  Top Layer w0.2: C12.2 -20.527,91.227 -20.925,91.625 -20.925,92.758 -20.808,92.875 U5.7
NetJ3_3: J3.3 R2.2 R4.1 | length 27.9
  Top Layer w0.2: R4.1 -5.715,99.651 -4.75,100.616 -4.75,104.25 -3.9,105.1 -3.9,106.3 -2.274,107.926 2.676,107.926 J3.3@4.92,110.17 ; J3.3 J3.3@4.92,110.17 ; R2.2 5.5,103.457 5.849,103.806 5.849,106.123 4.92,107.052 J3.3@4.92,110.17
NetJ3_4: J3.4 R5.2 | length 4.7
  Top Layer w0.2: R5.2 1.905,103.021 2.42,103.536 J3.4
NetJ3_6: J3.6 R6.2 | length 5
  Top Layer w0.2: R6.2 -3.81,104.27 J3.6
NetLED1_2: LED1.1 R1.1 | length 2.8
  Top Layer w0.25: LED1.1 R1.1
NetSB2_2: SB2.2 SB3.2 U3.14 | length 4.9
  Top Layer w0.25: U3.14 37.25,95.95 SB3.2 SB2.2
NetSB4_2: SB4.2 SB5.2 U3.15 | length 4.7
  Top Layer w0.25: U3.15 37.749,96.45 SB5.2 ; SB5.2 SB4.2
NetSB7_2: SB7.2 SB8.2 U4.14 | length 5.1
  Top Layer w0.2: U4.14 -28.45,95.95 SB8.2 -27.75,93.865 -27.85,93.765 SB7.2
NetSB9_2: SB9.2 SB10.2 U4.15 | length 4.9
  Top Layer w0.2: U4.15 -28.054,96.45 -27.754,96.75 SB10.2 SB9.2
REMOTE1: SB11.2 U3.4 | length 2.9
  Top Layer w0.25: SB11.2 29.55,95.45 U3.4
REMOTE2: SB12.2 U4.4 | length 2.9
  Top Layer w0.2: SB12.2 -36.45,95.45 U4.4
RUN: C1.2 J2.30 S1.2 | length 24.9
  Top Layer w0.2: J2.30 16.4,100.575 16.4,107.825 15.1,109.125 15.1,114.035 S1.2
RX1_N: J5.6 R13.1 U3.19 | length 12
  Top Layer w0.2: J5.6 32.923,105.899 32.923,106.065 32.806,106.182 31.759,106.182 31.072,105.495 31.072,104.152 31.727,103.497 31.727,102.152 R13.1@32.179,101.7 ; R13.1 R13.1@32.179,101.7 ; U3.19 32.75,98.446 32.727,98.469 32.727,99.469 31.727,100.469 31.727,101.248 R13.1@32.179,101.7
RX1_P: J5.3 R13.2 U3.20 | length 14.8
  Top Layer w0.2: R13.2 R13.2@30.821,101.7 ; U3.20 32.25,98.446 32.273,98.469 32.273,99.281 31.273,100.281 31.273,101.248 R13.2@30.821,101.7 ; J5.3 34.861,106.567 33.064,106.567 32.994,106.636 31.571,106.636 30.618,105.683 30.618,103.964 31.273,103.309 31.273,102.152 R13.2@30.821,101.7
RX2_N: J6.6 R18.1 U4.19 | length 13.2
  Top Layer w0.2: J6.6 -35.077,105.899 -35.077,106.065 -35.194,106.182 -36.241,106.182 -36.928,105.495 -36.928,104.58 -35.773,103.425 -35.773,102.152 R18.1@-35.321,101.7 ; R18.1 R18.1@-35.321,101.7 ; U4.19 -33.25,98.446 -33.273,98.469 -33.273,99.128 -34.342,100.196 -35.025,100.196 -35.773,100.944 -35.773,101.248 R18.1@-35.321,101.7
RX2_P: J6.3 R18.2 U4.20 | length 16
  Top Layer w0.2: R18.2 R18.2@-36.679,101.7 ; U4.20 -33.75,98.446 -33.727,98.469 -33.727,98.94 -34.53,99.742 -35.213,99.742 -36.227,100.756 -36.227,101.248 R18.2@-36.679,101.7 ; J6.3 -33.139,106.567 -34.936,106.567 -35.006,106.636 -36.429,106.636 -37.382,105.683 -37.382,104.392 -36.227,103.237 -36.227,102.152 R18.2@-36.679,101.7
"SPI0 CSn": J2.22 U3.6 | length 45.4
  Top Layer w0.25: J2.22 5.155,72.745 3.525,74.375 3.525,79.55 5.404,81.429 18.929,81.429 31.059,93.559 U3.6
"SPI0 RX": J2.21 U3.9 | length 43.1
  Top Layer w0.25: J2.21 11.408,70.205 11.533,70.205 11.533,70.627 12.291,70.627 12.291,68.17 13.049,68.17 13.049,70.205 13.75,70.205 15.955,70.205 34.375,88.625 34.375,91.675 33.254,92.796 33.254,93.256 U3.9
"SPI0 SCK": J2.24 U3.7 | length 43.2
  Top Layer w0.25: J2.24 11.856,77.825 11.981,77.825 11.981,80.365 12.739,80.365 12.739,77.063 13.497,77.063 13.497,80.365 14.255,80.365 14.255,77.063 15.013,77.063 15.013,77.825 15.85,77.825 17.15,77.825 32.25,92.925 U3.7
"SPI0 TX": J2.25 U3.8 | length 42.6
  Top Layer w0.25: J2.25 7.74,80.365 7.004,79.629 7.004,75.121 8.1,74.025 16.55,74.025 32.75,90.225 U3.8
"SPI1 CSn": J1.17 U4.6 | length 69.6
  Top Layer w0.2: U4.6 -36.25,93.141 -36.25,83.75 -16.5,64 -6.25,64 -2.75,67.5 -2.75,75.75 -4.825,77.825 J1.17
"SPI1 RX": J1.16 U4.9 | length 43.6
  Top Layer w0.2: U4.9 -32.75,92.75 -20.365,80.365 -17.594,80.365 -17.206,80.365 -17.206,79.43 -16.498,79.43 -16.498,81.462 -15.79,81.462 -15.79,79.43 -15.082,79.43 -15.082,81.462 -14.374,81.462 -14.374,79.43 -13.666,79.43 -13.666,81.462 -12.958,81.462 -12.958,79.43 -12.25,79.43 -12.25,80.365 -12.15,80.365 J1.16
"SPI1 SCK": J1.19 U4.7 | length 43.6
  Top Layer w0.2: U4.7 -33.75,92.75 -35,91.5 -35,86.75 -20.995,72.745 -16.75,72.745 -16.211,72.745 -16.211,73.908 -15.503,73.908 -15.503,71.578 -14.795,71.578 -14.795,72.745 -14.695,72.745 J1.19
"SPI1 TX": J1.20 U4.8 | length 43.5
  Top Layer w0.2: U4.8 -33.25,89.25 -20.5,76.5 -7.5,76.5 -6.5,75.5 -6.5,71.25 -7.545,70.205 J1.20
TX1_N: J5.2 R12.2 U3.18 | length 13.1
  Top Layer w0.2: U3.18 33.25,98.446 33.273,98.469 33.273,99.044 34.328,100.099 35.929,100.099 36.773,100.944 36.773,101.227 36.656,101.344 36.558,101.344 R12.2 36.558,102.056 36.656,102.056 36.773,102.173 36.773,103.177 38.222,104.626 38.222,105.992 38.105,106.109 37.939,106.109 37.175,105.345 J5.2
TX1_P: J5.1 R11.1 U3.17 | length 13.9
  Top Layer w0.2: U3.17 33.75,98.446 33.727,98.469 33.727,98.856 34.516,99.645 36.117,99.645 37.227,100.756 37.227,101.227 37.344,101.344 37.442,101.344 R11.1 37.442,102.056 37.344,102.056 37.227,102.173 37.227,102.988 38.676,104.437 38.676,106.18 38.293,106.563 37.939,106.563 37.822,106.68 37.822,106.988 J5.1
TX2_N: J6.2 R17.2 U4.18 | length 11.4
  Top Layer w0.2: U4.18 -32.75,98.446 -32.727,98.469 -32.727,99.115 -31.227,100.615 -31.227,101.227 -31.344,101.344 -31.442,101.344 R17.2 -31.442,102.056 -31.344,102.056 -31.227,102.173 -31.227,103.177 -29.778,104.626 -29.778,105.992 -29.895,106.109 -30.061,106.109 -30.825,105.345 J6.2
TX2_P: J6.1 R16.1 U4.17 | length 12.1
  Top Layer w0.2: U4.17 -32.25,98.446 -32.273,98.469 -32.273,98.927 -30.773,100.427 -30.773,101.227 -30.656,101.344 -30.558,101.344 R16.1 -30.558,102.056 -30.656,102.056 -30.773,102.173 -30.773,102.988 -29.324,104.437 -29.324,106.18 -29.707,106.563 -30.061,106.563 -30.178,106.68 -30.178,106.988 J6.1
"UART1 RX": J1.7 U5.9 | length 13.7
  Top Layer w0.2: U5.9 -12.675,92.225 -10.121,94.779 -10.121,101.994 J1.7
"UART1 TX": J1.6 U5.11 | length 15.1
  Top Layer w0.2: U5.11@-13.55,93.525 -12.043,93.525 -10.524,95.044 -10.524,104.131 J1.6
VBUS: C3.2 J2.40 R3.2 R6.1 U1.1 | length 50.9
  Top Layer w0.2: R6.1 R3.2 -1.905,97.605 -1.151,96.851 U1.1 -3.703,94.93 C3.2
  Top Layer w0.4: C3.2 -4.623,94.977 -5.4,94.2 -5.4,92.5 -4.2,91.3 1.625,91.3 6.763,96.438 6.763,116.338 J2.40
pads on no net: J1.1 J1.10 J1.11 J2.31 J2.32 J2.33 J2.34 J2.35 J2.37 J2.39 J3.MH1 J3.MH2 J3.MH3 J3.MH4 J3.MH5 J3.MH6 J3.MH7 J4.5 J4.6 J5.4 J5.7 J5.MH3 J5.MH4 J6.MH3 J6.MH4 S1.MH1 S1.MH2 U1.4 U2.4 U3.12 U3.13 U4.12 U4.13 U5.10

## Polygon pours and split planes (outlines as drawn)
GND on Top Layer "GND_L01_P000" (solid, pour order 0): -50,1.27 ccw(c-48.73,1.27) -48.73,0 48.73,0 ccw(c48.73,1.27) 50,1.27 50,115.96 ccw(c48.73,115.96) 48.73,117.23 46.27,117.23 cw(c46.27,118.5) 45,118.5 45,118.73 ccw(c43.73,118.73) 43.73,120 -43.73,120 ccw(c-43.73,118.73) -45,118.73 -45,118.5 cw(c-46.27,118.5) -46.27,117.23 -48.73,117.23 ccw(c-48.73,115.96) -50,115.96
GND on Bottom Layer "GND_L02_P001" (solid, pour order 1): -50,1.27 ccw(c-48.73,1.27) -48.73,0 48.73,0 ccw(c48.73,1.27) 50,1.27 50,115.96 ccw(c48.73,115.96) 48.73,117.23 46.27,117.23 cw(c46.27,118.5) 45,118.5 45,118.73 ccw(c43.73,118.73) 43.73,120 -43.73,120 ccw(c-43.73,118.73) -45,118.73 -45,118.5 cw(c-46.27,118.5) -46.27,117.23 -48.73,117.23 ccw(c-48.73,115.96) -50,115.96

## Silkscreen, mask and mechanical layers (free items; w line width, h text height)
Mechanical 1:
  the board outline again, w0.1
Board Shape:
  drawing of 482 lines, arcs and shapes, not listed
Drill Drawing:
  circle w0.254: c61.698,36.897 r0.847
  circle w0.254: c61.698,14.037 r0.508
  circle w0.254: c61.698,14.037 r0.847
  lines w0.254: 60.851,5.57 61.698,5.993 62.545,5.57 62.121,6.417 62.545,7.263 61.698,6.84 60.851,7.263 61.275,6.417 60.851,5.57 ; 60.851,9.803 61.275,9.803 61.275,9.38 62.121,9.38 62.121,9.803 62.545,9.803 62.545,10.65 62.121,10.65 62.121,11.073 61.275,11.073 61.275,10.65 60.851,10.65 60.851,9.803 ; 60.851,18.693 62.545,18.693 61.698,17 60.851,18.693 ; 60.851,21.657 61.698,20.81 62.545,21.657 61.698,22.503 60.851,21.657 ; 60.851,24.62 61.698,25.043 62.545,24.62 62.121,25.467 62.545,26.313 61.698,25.89 60.851,26.313 61.275,25.467 60.851,24.62 ; 60.851,28.853 61.275,28.853 61.698,28.43 62.121,28.853 62.545,28.853 62.121,29.277 62.545,29.7 62.121,29.7 61.698,30.123 61.275,29.7 60.851,29.7 61.275,29.277 60.851,28.853 ; 60.851,32.24 62.545,32.24 62.545,33.933 60.851,33.933 60.851,32.24 ; 60.851,41.553 62.545,41.553 61.698,39.86 60.851,41.553 ; 60.851,44.093 61.275,44.093 61.698,43.67 62.121,44.093 62.545,44.093 62.121,44.517 62.545,44.94 62.121,44.94 61.698,45.363 61.275,44.94 60.851,44.94 61.275,44.517 60.851,44.093 ; 60.851,47.48 60.851,47.903 61.275,48.327 60.851,48.75 60.851,49.173 61.275,49.173 61.698,48.75 62.121,49.173 62.545,49.173 62.545,48.75 62.121,48.327 62.545,47.903 62.545,47.48 62.121,47.48 61.698,47.903 61.275,47.48 60.851,47.48 ; 60.851,51.29 62.545,51.29 62.545,52.983 60.851,52.983 60.851,51.29 ; 61.19,5.909 61.698,6.163 62.206,5.909 61.952,6.417 62.206,6.925 61.698,6.671 61.19,6.925 61.444,6.417 61.19,5.909 ; 61.19,29.023 61.444,29.023 61.698,28.769 61.952,29.023 62.206,29.023 61.952,29.277 62.206,29.531 61.952,29.531 61.698,29.785 61.444,29.531 61.19,29.531 61.444,29.277 61.19,29.023 ; 61.19,41.215 62.206,41.215 61.698,40.199 61.19,41.215 ; 61.19,51.629 62.206,51.629 62.206,52.645 61.19,52.645 61.19,51.629
  lines w0.381: 59.333,4.427 334.947,4.427 ; 59.333,53.957 334.947,53.957 ; 73.325,0.617 73.325,57.767 ; 88.307,0.617 88.307,57.767 ; 117.508,0.617 117.508,57.767 ; 130.357,0.617 130.357,57.767 ; 148.996,0.617 148.996,57.767 ; 187.085,0.617 187.085,57.767 ; 202.067,0.617 202.067,57.767 ; 221.01,0.617 221.01,57.767 ; 244.371,0.617 244.371,57.767 ; 266.057,0.617 266.057,57.767 ; 299.931,0.617 299.931,57.767 ; 59.333,0.617 334.947,0.617 334.947,57.767 59.333,57.767 59.333,0.617
  text "Symbol" at 61.619,55.1 h1.83
  text "Count" at 74.468,55.1 h1.83
  text "Hole Size" at 89.45,55.1 h1.83
  text "Plated" at 118.651,55.1 h1.83
  text "Hole Type" at 131.5,55.1 h1.83
  text "Drill Layer Pair" at 150.139,55.1 h1.83
  text "Via/Pad" at 188.228,55.1 h1.83
  text "Pad Shape" at 203.21,55.1 h1.83
  text "Template" at 222.153,55.1 h1.83
  text "Description" at 245.514,55.1 h1.83
  text "Hole Tolerance (+)" at 267.2,55.1 h1.83
  text "Hole Tolerance (-)" at 301.074,55.1 h1.83
  text "2" at 74.468,51.29 h1.52
  text "39.37mil (1.000mm)" at 89.45,51.29 h1.52
  text "NPTH" at 118.651,51.29 h1.52
  text "Round" at 131.5,51.29 h1.52
  text "Top Layer - Bottom Layer" at 150.139,51.29 h1.52
  text "Pad" at 188.228,51.29 h1.52
  text "Rounded" at 203.21,51.29 h1.52
  text "c60hn100m0mx0" at 222.153,51.29 h1.52
  text "2" at 74.468,47.48 h1.52
  text "51.18mil (1.300mm)" at 89.45,47.48 h1.52
  text "PTH" at 118.651,47.48 h1.52
  text "Round" at 131.5,47.48 h1.52
  text "Top Layer - Bottom Layer" at 150.139,47.48 h1.52
  text "Pad" at 188.228,47.48 h1.52
  text "Rounded" at 203.21,47.48 h1.52
  text "c195h130m0mx0" at 222.153,47.48 h1.52
  text "2" at 74.468,43.67 h1.52
  text "98.43mil (2.500mm)" at 89.45,43.67 h1.52
  text "NPTH" at 118.651,43.67 h1.52
  text "Round" at 131.5,43.67 h1.52
  text "Top Layer - Bottom Layer" at 150.139,43.67 h1.52
  text "Pad" at 188.228,43.67 h1.52
  text "Rounded" at 203.21,43.67 h1.52
  text "c250hn250m250" at 222.153,43.67 h1.52
  text "3" at 74.468,39.86 h1.52
  text "55.12mil (1.400mm)" at 89.45,39.86 h1.52
  text "PTH" at 118.651,39.86 h1.52
  text "Round" at 131.5,39.86 h1.52
  text "Top Layer - Bottom Layer" at 150.139,39.86 h1.52
  text "Pad" at 188.228,39.86 h1.52
  text "Rounded" at 203.21,39.86 h1.52
  text "(Mixed)" at 222.153,39.86 h1.52
  text "4" at 74.468,36.05 h1.52
  text "59.06mil (1.500mm)" at 89.45,36.05 h1.52
  text "PTH" at 118.651,36.05 h1.52
  text "Round" at 131.5,36.05 h1.52
  text "Top Layer - Bottom Layer" at 150.139,36.05 h1.52
  text "Pad" at 188.228,36.05 h1.52
  text "Rounded" at 203.21,36.05 h1.52
  text "c210h150m0mx0" at 222.153,36.05 h1.52
  text "4" at 74.468,32.24 h1.52
  text "118.11mil (3.000mm)" at 89.45,32.24 h1.52
  text "PTH" at 118.651,32.24 h1.52
  text "Round" at 131.5,32.24 h1.52
  text "Top Layer - Bottom Layer" at 150.139,32.24 h1.52
  text "Pad" at 188.228,32.24 h1.52
  text "Rounded" at 203.21,32.24 h1.52
  text "c560h300m408" at 222.153,32.24 h1.52
  text "4" at 74.468,28.43 h1.52
  text "128.35mil (3.260mm)" at 89.45,28.43 h1.52
  text "NPTH" at 118.651,28.43 h1.52
  text "Round" at 131.5,28.43 h1.52
  text "Top Layer - Bottom Layer" at 150.139,28.43 h1.52
  text "Pad" at 188.228,28.43 h1.52
  text "Rounded" at 203.21,28.43 h1.52
  text "c163hn326m0mx0" at 222.153,28.43 h1.52
  text "5" at 74.468,24.62 h1.52
  text "23.62mil (0.600mm)" at 89.45,24.62 h1.52
  text "PTH" at 118.651,24.62 h1.52
  text "Round" at 131.5,24.62 h1.52
  text "Top Layer - Bottom Layer" at 150.139,24.62 h1.52
  text "(Mixed)" at 188.228,24.62 h1.52
  text "Rounded" at 203.21,24.62 h1.52
  text "(Mixed)" at 222.153,24.62 h1.52
  text "5" at 74.468,20.81 h1.52
  text "39.37mil (1.000mm)" at 89.45,20.81 h1.52
  text "PTH" at 118.651,20.81 h1.52
  text "Round" at 131.5,20.81 h1.52
  text "Top Layer - Bottom Layer" at 150.139,20.81 h1.52
  text "Pad" at 188.228,20.81 h1.52
  text "Rounded" at 203.21,20.81 h1.52
  text "(Mixed)" at 222.153,20.81 h1.52
  text "7" at 74.468,17 h1.52
  text "47.24mil (1.200mm)" at 89.45,17 h1.52
  text "NPTH" at 118.651,17 h1.52
  text "Round" at 131.5,17 h1.52
  text "Top Layer - Bottom Layer" at 150.139,17 h1.52
  text "Pad" at 188.228,17 h1.52
  text "Rounded" at 203.21,17 h1.52
  text "c120hn120m0mx0" at 222.153,17 h1.52
  text "16" at 74.468,13.19 h1.52
  text "35.04mil (0.890mm)" at 89.45,13.19 h1.52
  text "PTH" at 118.651,13.19 h1.52
  text "Round" at 131.5,13.19 h1.52
  text "Top Layer - Bottom Layer" at 150.139,13.19 h1.52
  text "Pad" at 188.228,13.19 h1.52
  text "(Mixed)" at 203.21,13.19 h1.52
  text "(Mixed)" at 222.153,13.19 h1.52
  text "40" at 74.468,9.38 h1.52
  text "40.95mil (1.040mm)" at 89.45,9.38 h1.52
  text "PTH" at 118.651,9.38 h1.52
  text "Round" at 131.5,9.38 h1.52
  text "Top Layer - Bottom Layer" at 150.139,9.38 h1.52